# Altium PCB Open Source Programmable Load Main PCB.PcbDoc (part 2 of 2)
Units mil, origin at the board's own origin, x right, y up, seen from the top; angles counter-clockwise.
Board outline 6000 x 4000 mil, 2 copper layers (Top Layer, Bottom Layer); 90 components, 53 nets, 308 pads, 4 vias.
Unrouted connection lines stored in the file: 150.
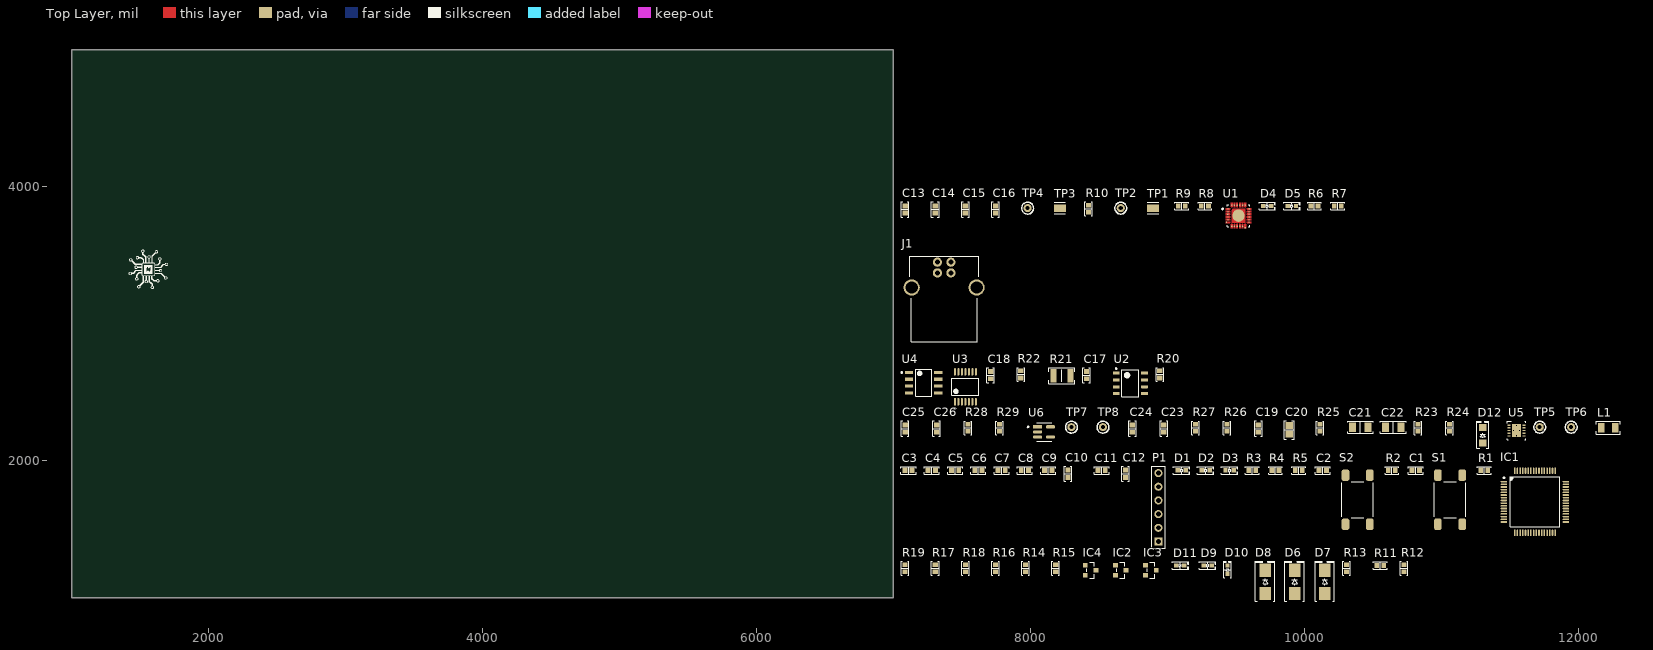
[diagram p0: Top Layer view]

## Part data (continued)
R26: library part RMCF0603FT18K0, "RES 18K OHM 1% 1/10W 0603", Device Package="0603 (1608 Metric)", manufacturer="Stackpole Electronics Inc", Operating Temperature="-55°C ~ 155°C", Power (Watts)="0.1W, 1/10W", Ratings=AEC-Q200, Supplier Device Package=0603, Supplier Part Number 1=RMCF0603FT18K0CT-ND, Temperature Coefficient=±100ppm/°C, Tolerance=±1%, componentlink1description=Datasheet, componentlink1url=https://www.seielect.com/catalog/sei-packaging.pdf, componentlink2description="DigiKey Link", componentlink2url=https://www.digikey.com/en/products/detail/stackpole-electronics-inc/RMCF0603FT18K0/1713690, Composition="Thick Film", Features="Automotive AEC-Q200", Height - Seated (Max)="0.022\" (0.55mm)", lastupdated="2023-01-02 8:30:03 PM", Lifecycle Status=Active, Minimum Order=1, Number of Terminations=2, Package / Case="0603 (1608 Metric)", packaging=CutTape, Part Number=RMCF0603FT18K0, Part Status=Active, partid=10797, price=0.01, Resistance="18 kOhms", series=RMCF, Size / Dimension="0.061\" L x 0.031\" W (1.55mm x 0.80mm)", Supplier 1=DigiKey
R27: library part CRGP0603F68K, "RES 68K OHM 1% 1/4W 0603", Device Package="0603 (1608 Metric)", manufacturer="TE Connectivity Passive Product", Operating Temperature="-55°C ~ 155°C", Power (Watts)="0.25W, 1/4W", Supplier Device Package=0603, Supplier Part Number 1=A130438CT-ND, Temperature Coefficient=±100ppm/°C, Tolerance=±1%, componentlink1description=Datasheet, componentlink1url=https://www.te.com/commerce/DocumentDelivery/DDEController?Action=srchrtrv&DocNm=9-1773463-9&DocType=DS&DocLang=English, componentlink2description="DigiKey Link", componentlink2url=https://www.digikey.com/en/products/detail/te-connectivity-passive-product/CRGP0603F68K/8577040, Composition="Thick Film", Features="Pulse Withstanding", Height - Seated (Max)="0.022\" (0.55mm)", lastupdated="2023-01-02 8:30:26 PM", Lifecycle Status=Active, Minimum Order=1, Number of Terminations=2, Package / Case="0603 (1608 Metric)", packaging=TapeAndReel, Part Number=CRGP0603F68K, Part Status=Active, partid=5012, price=0.01, Resistance="68 kOhms", series=CRGP, Size / Dimension="0.063\" L x 0.031\" W (1.60mm x 0.80mm)", Supplier 1=DigiKey
S1 S2: "SWITCH TACTILE SPST-NO 0.05A 24V", Contact Rating @ Voltage="0.05A @ 24VDC", manufacturer="TE Connectivity ALCOSWITCH Switches", Operating Force=260gf, Operating Temperature="-35°C ~ 85°C", Supplier Part Number 1=450-2055-1-ND, Actuator Height off PCB, Vertical=5.00mm, Actuator Orientation="Top Actuated", Actuator Type=Standard, Circuit=SPST-NO, componentlink1description=Datasheet, componentlink1url=https://www.te.com/commerce/DocumentDelivery/DDEController?Action=srchrtrv&DocNm=1308111-1_SWITCHES_CORE_PROGRAM_CATALOG&DocType=CS&DocLang=English, componentlink2description="DigiKey Link", componentlink2url=https://www.digikey.com/en/products/detail/te-connectivity-alcoswitch-switches/1571563-4/2400231, Illumination=Non-Illuminated, lastupdated="2022-09-13 7:41:06 AM", Lifecycle Status=Active, Minimum Order=1, Mounting Type="Surface Mount", Outline="6.00mm x 6.00mm", packaging=TapeAndReel, Part Number=1571563-4, Part Status=Active, price=0.16, series=FSMJSMA, Supplier 1=DigiKey, Switch Function=Off-Mom, Termination Style="Gull Wing"
TP1 TP3: library part CMP-00053-4, "Conn Test Point 1 POS Solder ST SMD 1 Port T/R", Color=Natural, Body Material=Brass, Material="Copper Alloy", Mount="Surface Mount", packaging="Cut Tape", Plating=Tin, series="S2751, EZ BoardWare"
TP2 TP4 TP5 TP6 TP7 TP8: library part CMP-002-00006-1, "1.5mm Test Point 0.75mm hole size"
U1: library part CMP-08107-000010-1, "IC USB TO UART BRIDGE QFN24"
U2: library part CMP-0704-00003-2, "Zero-Drift, Bi-Directional Current / Power Monitor, 3 to 5.5 V, -40 to 125 degC, 8-pin SOIC (D8), Green (RoHS & no Sb/Br)", manufacturer="Texas Instruments", Quiescent Current (+/-)(Typ)(mA)=0.7, Rating=Catalog, CMRR(Min)(dB)=100, Code_JEDEC=MS-012, Common Mode Range(Max)(V)=26, Common Mode Range(Min)(V)=0, componentlink1description="Manufacturer URL", componentlink1url=http://www.ti.com/, componentlink2description=Datasheet, componentlink2url=http://www.ti.com/general/docs/lit/getliterature.tsp?genericPartNumber=INA219&fileType=pdf, ComponentLink3Description="Package Specification", ComponentLink3URL=http://www.ti.com/lit/ml/msoi002j/msoi002j.pdf, DatasheetVersion=SBOS448F, Eco-Plan="Green (RoHS & no Sb/Br)", Gain(V/V)="1, 0.5, 0.25, 0.125", Input Offset (+/-)(Max)(uV)=100, Mounting Technology="Surface Mount", PackageDescription="8-Pin Plastic Small Outline, Body 4.9 x 3.9 mm, Pitch 1.27 mm", PackageReference=D0008A, PackageVersion="4040047-3/M, 06/2011", PartNumber=INA219AIDR, Small-Signal Bandwidth(Typ)(MHz)=0.011, SubFamily="Current Shunt Monitor", Vs(Max)(V)=5.5, Vs(Min)(V)=3
U3: library part CMP-04895-000279-1, "IC OPAMP GP 4 CIRCUIT 14TSSOP", Case/Package=TSSOP, Input Bias Current=250nA, Input Offset Voltage (Vos)=7mV, Max Operating Temperature=125°C, Max Supply Voltage=5.5V, Min Operating Temperature=-40°C, Min Supply Voltage=2.7V, Nominal Supply Current=170uA, Operating Supply Current=410uA, Output Current=160mA, Package Quantity=2000, Power Supply Rejection Ratio (PSRR)=50dB, Voltage Gain=100dB, Amplifier Type="GENERAL PURPOSE", Bandwidth=1MHz, Common Mode Rejection Ratio=50dB, Contact Plating=Gold, Gain Bandwidth Product=1MHz, Height=1.15mm, Lead Free="Lead Free", Length=5mm, Mount="Surface Mount", Number of Amplifiers=4, Number of Channels=4, Number of Circuits=4, Number of Elements=4, Number of Pins=14, Output Current per Channel=160mA, packaging="Tape and Reel", Radiation Hardening=No, REACH SVHC="No SVHC", RoHS Compliant=Yes, series=-, Slew Rate=1V/µs, Supply Current=170uA, Technology=BICMOS, Unity Gain Bandwidth Product=1MHz, Width=4.4mm
U4: library part CMP-04895-000136-1, "IC OPAMP GP 2 CIRCUIT 8SOIC", Case/Package=SOIC, Input Bias Current=250nA, Input Offset Voltage (Vos)=7mV, Max Operating Temperature=125°C, Max Supply Voltage=5.5V, Min Operating Temperature=-40°C, Min Supply Voltage=2.7V, Nominal Supply Current=440uA, Operating Supply Current=210uA, Output Current=160mA, Package Quantity=2500, Power Supply Rejection Ratio (PSRR)=50dB, Voltage Gain=100dB, Bandwidth=1MHz, Common Mode Rejection Ratio=50dB, Contact Plating=Gold, Gain Bandwidth Product=1MHz, Height=1.58mm, Lead Free="Lead Free", Length=4.9mm, Mount="Surface Mount", Number of Amplifiers=2, Number of Channels=2, Number of Circuits=2, Number of Elements=2, Number of Pins=8, Output Current per Channel=160mA, packaging="Tape and Reel", Radiation Hardening=No, REACH SVHC="No SVHC", RoHS Compliant=Yes, Slew Rate=1V/µs, Unity Gain Bandwidth Product=1MHz, Width=3.91mm
U5: library part CMP-0347-00018-4, "Boost Voltage Converter with 2.3 to 6 V Input and 2.8 to 18.5 V Output, -40 to 85 degC, 10-Pin SON (DRC), Green (RoHS & no Sb/Br)", manufacturer="Texas Instruments", Switching Frequency(Typ)(kHz)=1200, componentlink1description=Datasheet, componentlink1url=http://www.ti.com/general/docs/lit/getliterature.tsp?genericPartNumber=TPS61086&fileType=pdf, componentlink2description="Package Specification", componentlink2url=http://www.ti.com/litv/pdf/mpds117k, DatasheetVersion=SLVSA05, Eco-Plan="Green (RoHS & no Sb/Br)", Mounting Technology="Surface Mount", PackageDescription="10-Pin Plastic Small Outline No-Lead, 3 x 3 x 1 mm Body, 0.5 mm Pitch, Exposed Pad", PackageReference=DRC0010A, PackageVersion="revL, Sep-2011", PartNumber=TPS61086DRCR, Regulated Outputs(#)=1, SubFamily="Step-Up Regulator", Topology=Boost, Vin(Max)(V)=6, Vin(Min)(V)=2.3, Vout(Max)(V)=18.5, Vout(Min)(V)=2.8
U6: library part CMP-12756-000035-1, "IC REG LINEAR 3.3V 600MA SOT25", Case/Package=SOT-23-5, Dropout Voltage=250mV, Max Input Voltage=6V, Max Operating Temperature=85°C, Max Output Current=600mA, Min Input Voltage=2.5V, Min Operating Temperature=-40°C, Output Voltage=3.3V, Package Quantity=1, Quiescent Current=55uA, Accuracy=1.5%, Height=1.3mm, Lead Free="Lead Free", Length=3.1mm, Mount="Surface Mount", Number of Outputs=1, Number of Pins=5, Number of Regulators=1, Output Current=600mA, Output Type=Fixed, packaging="Tape and Reel", Polarity=Positive, Width=1.7mm

## Via types
v1: diameter 19.68, hole 7.87, Top Layer to Bottom Layer, 4 vias

## Nets (pads, with @x,y where several pads share a name; then routed paths per layer and width w, separated by ;. In a path a pad name is that pad's centre, name@x,y a point inside that pad or via, vN(x,y) a via of type N, cw(c..) or ccw(c..) an arc to the next point about the centre after c; other vN are vias at no path point)
3V3: C3.2 C4.2 C5.2 C6.2 C7.2 C8.2 C9.2 C10.2 C11.2 C12.2 C18.2 R1.2 R2.2 R29.2 U2.5
3V3_USB: C15.2 C16.2 R10.2 U1.5 U1.6
5V_USB: C13.2 C14.2 C19.2 C20.2 C25.2 J1.1 R6.1 R7.1 R8.2 R23.1 R28.1 TP5.1 TP7.1 U1.7
12V: D6.2 D7.2 D8.2 R11.2 R12.2 R13.2 R24.2
BLUE: R3.2
BOOT0: C1.2 R1.1 S1.3 S1.4
GND: C1.1 C2.1 C3.1 C4.1 C5.1 C6.1 C7.1 C8.1 C9.1 C10.1 C11.1 C12.1 C13.1 C14.1 C15.1 C16.1 C18.1 C19.1 C20.1 C21.1 C22.1 C23.1 C24.1 C25.1 C26.1 D1.2 D2.2 D3.2 IC2.2 IC3.2 IC4.2 J1.4 J1.S P1.1 R9.1 R17.1 R18.1 R19.1 R26.1 S1.1 S1.2 S2.1 S2.2 U1.2 U1.25 U2.1 U2.2 U2.6 U5.4 U5.5 U5.9 U5.11 U6.2
  other v1: 11550,2182.6 11527.36,2220 11572.64,2220 11550,2257.4
GREEN: R5.2
NetC17_1: C17.1 R22.2 U2.7
NetC17_2: C17.2 R20.2 U2.8
NetC21_2: C21.2 C22.2 D12.2 R24.1 R25.2 TP6.1
NetC23_2: C23.2 U5.10
NetC24_2: C24.2 R27.1
NetC26_2: C26.2 R29.1 TP8.1 U6.5
NetD1_1: D1.1 R3.1
NetD2_1: D2.1 R4.1
NetD3_1: D3.1 R5.1
NetD4_1: D4.1 R6.2
NetD4_2: D4.2 U1.14
NetD5_1: D5.1 R7.2
NetD5_2: D5.2 U1.13
NetD6_1: D6.1 D9.2 IC2.3
NetD7_1: D7.1 D10.2 IC3.3
NetD8_1: D8.1 D11.2 IC4.3
NetD9_1: D9.1 R11.1
NetD10_1: D10.1 R12.1
NetD11_1: D11.1 R13.1
NetD12_1: D12.1 L1.2 U5.6 U5.7
NetIC2_1: IC2.1 R14.1
NetIC3_1: IC3.1 R15.1
NetIC4_1: IC4.1 R16.1
NetL1_1: L1.1 R23.2 U5.8
NetR8_1: R8.1 R9.2 U1.8
NetR10_1: R10.1 U1.9
NetR14_2: R14.2 R17.2
NetR15_2: R15.2 R18.2
NetR16_2: R16.2 R19.2
NetR21_1: R21.1 R22.1
NetR25_1: R25.1 R26.2 U5.2
NetR27_2: R27.2 U5.1
NetR28_2: R28.2 U6.1 U6.3
NetTP1_1: TP1.1 U1.3
NetTP2_1: TP2.1 U1.20
NetTP3_1: TP3.1 U1.4
NetTP4_1: TP4.1 U1.21
NetU2_3: U2.3
NetU2_4: U2.4
NetU5_3: U5.3
RED: R4.2
RST: C2.2 R2.1 S2.3 S2.4
USB_N: J1.2
USB_P: J1.3
VCC_DUT: R20.1 R21.2
pads on no net: IC1.1 IC1.2 IC1.3 IC1.4 IC1.5 IC1.6 IC1.7 IC1.8 IC1.9 IC1.10 IC1.11 IC1.12 IC1.13 IC1.14 IC1.15 IC1.16 IC1.17 IC1.18 IC1.19 IC1.20 IC1.21 IC1.22 IC1.23 IC1.24 IC1.25 IC1.26 IC1.27 IC1.28 IC1.29 IC1.30 IC1.31 IC1.32 IC1.33 IC1.34 IC1.35 IC1.36 IC1.37 IC1.38 IC1.39 IC1.40 IC1.41 IC1.42 IC1.43 IC1.44 IC1.45 IC1.46 IC1.47 IC1.48 IC1.49 IC1.50 IC1.51 IC1.52 IC1.53 IC1.54 IC1.55 IC1.56 IC1.57 IC1.58 IC1.59 IC1.60 IC1.61 IC1.62 IC1.63 IC1.64 P1.2 P1.3 P1.4 P1.5 P1.6 U1.1 U1.10 U1.11 U1.12 U1.15 U1.16 U1.17 U1.18 U1.19 U1.22 U1.23 U1.24 U3.1 U3.2 U3.3 U3.4 U3.5 U3.6 U3.7 U3.8 U3.9 U3.10 U3.11 U3.12 U3.13 U3.14 U4.1 U4.2 U4.3 U4.4 U4.5 U4.6 U4.7 U4.8 U6.4

## Silkscreen, mask and mechanical layers (free items; w line width, h text height)
Top Overlay:
  drawing of 2 lines, arcs and shapes, not listed